# Altium PCB PCB1.PcbDoc
Units mm, origin at the board's own origin, x right, y up, seen from the top; angles counter-clockwise.
Board outline 114 x 72 mm, 2 copper layers (Top Layer, Bottom Layer); 29 components, 32 nets, 166 pads, 7 vias.
Unrouted connection lines stored in the file: 2.
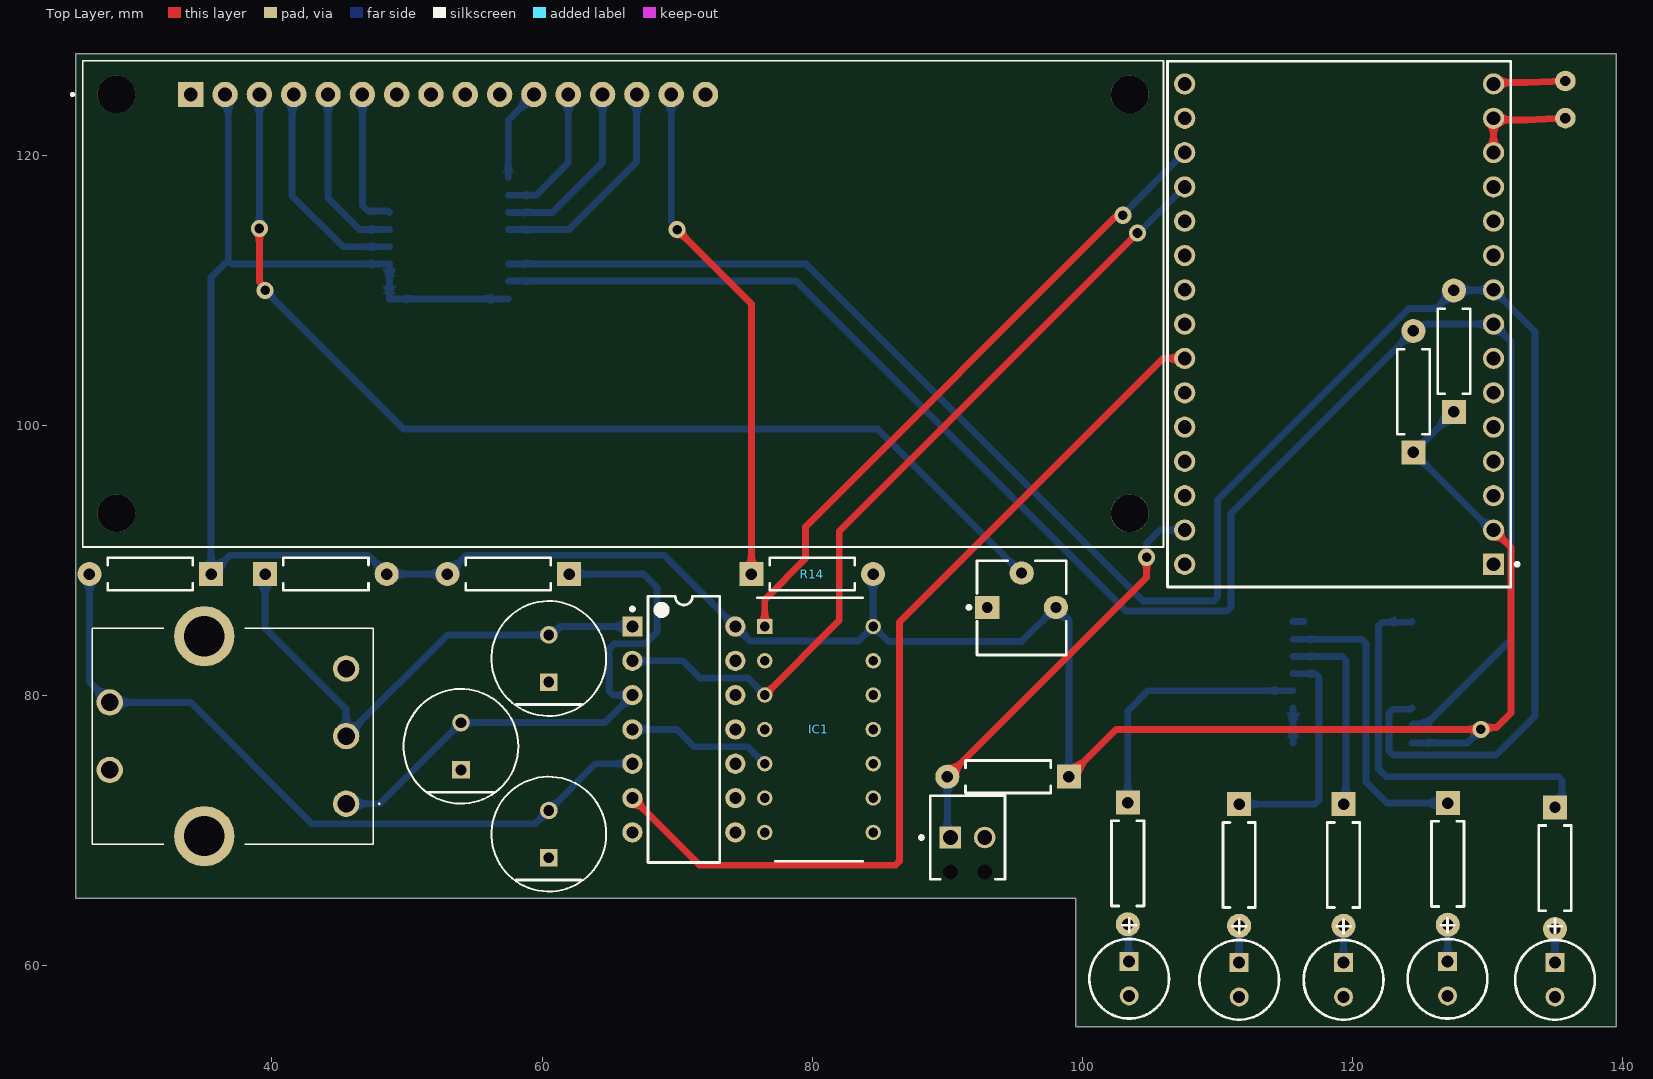
[diagram p0: Top Layer view]
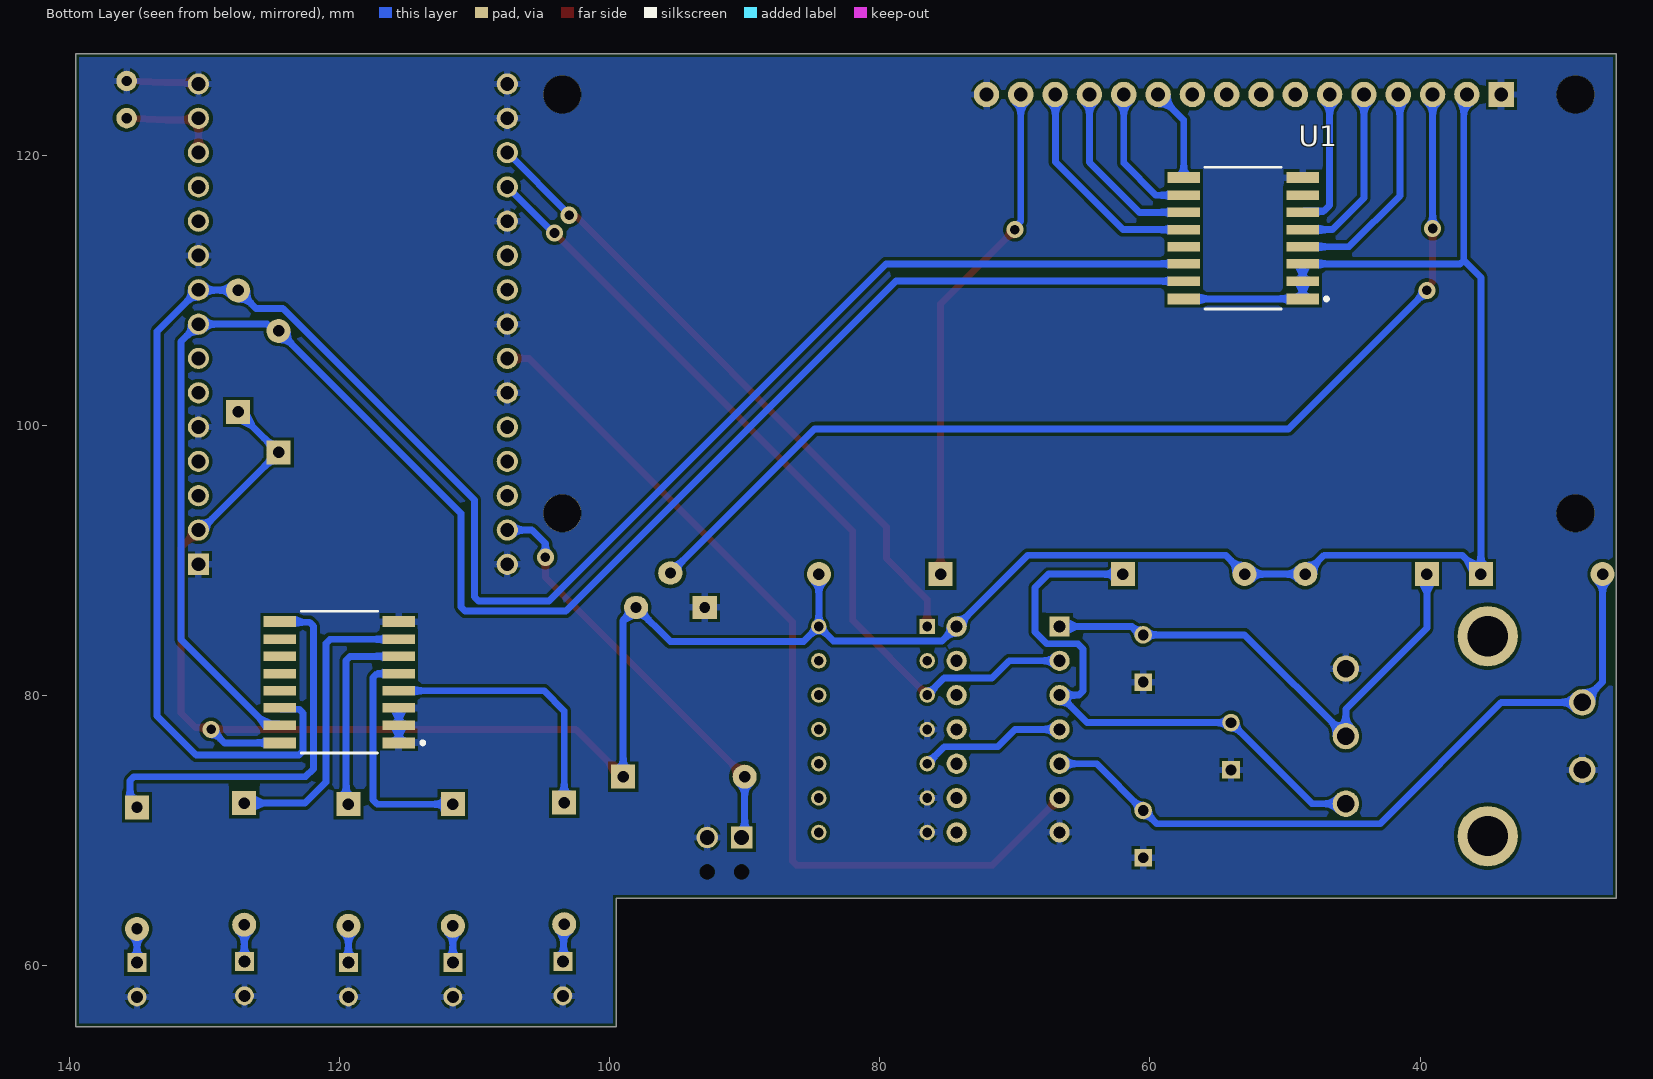
[diagram p1: Bottom Layer view, seen from below]

## Layer stack, top to bottom
Top Solder: solder mask 0.0102, Solder Resist, Dk 3.5
Top Layer: signal copper 0.0356
Dielectric 1: dielectric 0.32, FR-4, Dk 4.8
Bottom Layer: signal copper 0.0356
Bottom Solder: solder mask 0.0102, Solder Resist, Dk 3.5

## Board outline
25.5,127.5 26,127.5 139.5,127.5 139.5,55.5 99.5,55.5 99.5,65 99,65 25.5,65

## Design rules (kind name [scope] priority, off if disabled: settings)
Clearance [All] p1: gap=0.254 ignorepadtopadclearanceinfootprint=FALSE except(0: Arc-Hole Track-Hole SMDPad-Hole THPad-Hole Via-Hole Fill-Hole Poly-Hole Region-Hole Text-Hole)
ComponentClearance [All] p1 off: gap=0.254 collisioncheckmode=3 verticalgap=0.254 showdistances=FALSE
Height [All] p1 off: minheight=0 maxheight=25.4 prefheight=12.7
HoleSize [All] p1: absolutevalues=TRUE maxlimit=3 minlimit=0.7 maxpercent=80.000 minpercent=20.000
MinimumSolderMaskSliver [All] p1: minsoldermaskwidth=0.125
PlaneConnect [All] p1: planeconnectstyle=Relief reliefexpansion=0.508 reliefentries=4 reliefconductorwidth=0.305 reliefairgap=0.254
PolygonConnect [All] p1: connectstyle=Relief reliefconductorwidth=0.5 reliefentries=4 polygonreliefangle="90 Angle" airgapwidth=0.2
RoutingVias [All] p1: holewidth=0.7 width=1.7 viastyle="Through Hole" minholewidth=0.7 minwidth=1.7 maxholewidth=0.7 maxwidth=1.7
SilkToSilkClearance [All] p1: silktosilkclearance=0.12
SilkToSolderMaskClearance [IsPad] p1: minsilkscreentomaskgap=0.1 clearancetoexposedcopper=TRUE
SolderMaskExpansion [All] p1: expansion=0.102 istentingtop=FALSE
SupplyNets "Schematic Supply Nets_3" [InNet('+3.3')] p1: voltage=0.000
SupplyNets "Schematic Supply Nets_2" [InNet('GND')] p2: voltage=0.000
SupplyNets "Schematic Supply Nets" [InNet('+5')] p3: voltage=0.000
Width [All] p1: maxlimit=3.048 minlimit=0.305 preferedwidth=0.508
23 further rules are at their usual default settings.

## Classes and differential pairs
component class car_controler_sch: R14

## Components (designator, comment, footprint, x,y, rotation, side; value= is the part's Value field where it differs from the comment)
(0-20/10k "3362P-1-104LF" BOUR-3362P 95.5,86.5 r0 top
C1 "ECA-2WHG010" FP-ECA-2WHG010-MFG 60.5,82.75 r90 top
C2 "ECA-2WHG010" FP-ECA-2WHG010-MFG 54,76.25 r90 top
C3 "ECA-2WHG010" FP-ECA-2WHG010-MFG 60.5,69.75 r90 top
DS1 "RED" KING-WP7113SGD_V 103.461,59.047 r270 top
DS2 "RED" KING-WP7113SGD_V 111.602,58.966 r270 top
DS3 "RED" KING-WP7113SGD_V 119.33,58.966 r270 top
DS4 "RED" KING-WP7113SGD_V 127.027,59.047 r270 top
DS5 "RED" KING-WP7113SGD_V 134.982,58.966 r270 top
IC1 "HEF4013BP" DIP802W53P254L1902H420Q14N 80.5,77.5 r0 top
J1 "1725656" PHOE-1725656-2 91.5,69.5 r0 top
MD1 "ESP32-C3-DevKitC-02" FP-ESP32-C3-DevKitC-02-MFG 119,107.5 r180 top locked
R1 "Resistor 470r" RESA60-630X240 103.359,67.581 r270 top value=150r
R2 "Resistor 470r" RESA60-630X240 111.602,67.466 r270 top value=150r
R3 "Resistor 470r" RESA60-630X240 119.33,67.466 r270 top value=150r
R4 "Resistor 470r" RESA60-630X240 127.045,67.547 r270 top value=150r
R5 "Resistor 470r" RESA60-630X240 134.982,67.236 r270 top value=150r
R6 "4k7 resistor Axial" RESA60-630X240 94.5,74 r180 top value=10k
R9 "4k7 resistor Axial" RESA60-630X240 31,89 r180 top value=10k
R10 "4k7 resistor Axial" RESA60-630X240 44,89 r0 top value=10k
R11 "4k7 resistor Axial" RESA60-630X240 57.5,89 r180 top value=10k
R12 "4k7 resistor Axial" RESA60-630X240 124.5,102.5 r90 top value=4k7
R13 "4k7 resistor Axial" RESA60-630X240 127.5,105.5 r90 top value=4k7
R14 "4k7 resistor Axial" RESA60-630X240 80,89 r0 top value=220r
U1 "PCF8574T/3,518" FP-SOT162-1-MFG 53.1,113.865 r0 bottom
U2 "PCF8574T/3,518" FP-SOT162-1-MFG 120,81 r0 bottom
U3 "LCD-16X2" MODULE_LCD-16X2 66,109 r0 top locked
U4 "" PEC164120FS0012 45.5,72 r90 top
U5 "SN74LS14N" N0014A 70.5,77.5 r0 top

## Footprints (in the part's own frame and the unit in brackets; to place one, negate y for a bottom-side part, rotate by r counter-clockwise, add the part's x,y. Pads: shape width x height; smd on the part's side, far side on the other; paste and mask are expansions set on the pad)
BOUR-3362P [mm]
  rect 1.8x1.7 hole 0.8: 1(-2.54,0.035)
  oval 1.8x1.7 hole 0.8: 2(0,2.575) 3(2.54,0.035)
  silkscreen extent -4.02,-3.49 3.3,3.5, body extent -3.3,-3.49 3.3,3.5, height 4.5
DIP802W53P254L1902H420Q14N [mm]
  rect 1.13x1.13 hole 0.73: 1(-4.012,7.62)
  round 1.13 hole 0.73: 2(-4.012,5.08) 3(-4.012,2.54) 4(-4.012,0) 5(-4.012,-2.54) 6(-4.012,-5.08) 7(-4.012,-7.62) 8(4.012,-7.62) 9(4.012,-5.08) 10(4.012,-2.54) 11(4.012,0) 12(4.012,2.54) 13(4.012,5.08) 14(4.012,7.62)
  silkscreen extent -4.58,-9.75 3.24,9.75, body extent -4.15,-9.51 4.15,9.51, height 4.2
FP-ECA-2WHG010-MFG [mm]
  rect 1.3x1.3 hole 0.8 paste-2539.97 mask+0: 1(-1.75,0)
  round 1.3 hole 0.8 paste-2539.97 mask+0: 2(1.75,0)
  silkscreen extent -4.25,-4.25 4.25,4.25, body extent -4.35,-4.35 4.35,4.35, height 0.25
FP-ESP32-C3-DevKitC-02-MFG [mm]
  rect 1.57x1.57 hole 1.02 paste-2539.97 mask+0: 1(-11.43,17.78)
  round 1.57 hole 1.02 paste-2539.97 mask+0: 2(-11.43,15.24) 3(-11.43,12.7) 4(-11.43,10.16) 5(-11.43,7.62) 6(-11.43,5.08) 7(-11.43,2.54) 8(-11.43,0) 9(-11.43,-2.54) 10(-11.43,-5.08) 11(-11.43,-7.62) 12(-11.43,-10.16) 13(-11.43,-12.7) 14(-11.43,-15.24) 15(-11.43,-17.78) 16(11.43,-17.78) 17(11.43,-15.24) 18(11.43,-12.7) 19(11.43,-10.16) 20(11.43,-7.62) 21(11.43,-5.08) 22(11.43,-2.54) 23(11.43,0) 24(11.43,2.54) 25(11.43,5.08) 26(11.43,7.62) 27(11.43,10.16) 28(11.43,12.7) 29(11.43,15.24) 30(11.43,17.78)
  silkscreen extent -13.3,-19.46 12.7,19.46, body extent -12.8,-19.56 12.8,19.56, height 0.25
FP-SOT162-1-MFG [mm]
  rect 2.4x0.8 smd paste+0 mask+0: 1(-4.4,4.495) 8(-4.4,-4.495) 9(4.4,-4.495) 16(4.4,4.495)
  rect 2.4x0.7 smd paste+0 mask+0: 2(-4.4,3.175) 3(-4.4,1.905) 4(-4.4,0.635) 5(-4.4,-0.635) 6(-4.4,-1.905) 7(-4.4,-3.175) 10(4.4,-3.175) 11(4.4,-1.905) 12(4.4,-0.635) 13(4.4,0.635) 14(4.4,1.905) 15(4.4,3.175)
  silkscreen extent -6.29,-5.25 2.83,5.25, body extent -5.15,-5.15 5.15,5.15, height 2.65
KING-WP7113SGD_V [mm]
  rect 1.4x1.4 hole 0.889: 1(-1.27,0)
  round 1.4 hole 0.889: 2(1.27,0)
  silkscreen extent -4.47,-2.95 2.95,2.95, body extent -2.95,-2.95 2.5,2.95, height 15.5
MODULE_LCD-16X2 [mm]
  rect 1.88x1.88 / inner round 1.88 / far side rect 1.88x1.88 hole 1.016: 1(-32,15.5)
  round 1.88 hole 1.016: 2(-29.46,15.5) 3(-26.92,15.5) 4(-24.38,15.5) 5(-21.84,15.5) 6(-19.3,15.5) 7(-16.76,15.5) 8(-14.22,15.5) 9(-11.68,15.5) 10(-9.14,15.5) 11(-6.6,15.5) 12(-4.06,15.5) 13(-1.52,15.5) 14(1.02,15.5) 15(3.56,15.5) 16(6.1,15.5)
  round 2.8 hole 2.8 unplated: ""(-37.5,-15.5) ""(-37.5,15.5) ""(37.5,-15.5) ""(37.5,15.5)
  silkscreen extent -40.85,-18 40,18
N0014A [mm] "DIP, 14-Leads, Body 19.7x6.6mm, Pitch 2.54mm"
  rect 1.5x1.5 hole 0.9: 1(-3.81,7.62)
  round 1.5 hole 0.9: 2(-3.81,5.08) 3(-3.81,2.54) 4(-3.81,0) 5(-3.81,-2.54) 6(-3.81,-5.08) 7(-3.81,-7.62) 8(3.81,-7.62) 9(3.81,-5.08) 10(3.81,-2.54) 11(3.81,0) 12(3.81,2.54) 13(3.81,5.08) 14(3.81,7.62)
  silkscreen extent -3.93,-9.85 2.65,9.85, body extent -3.95,-9.85 3.95,9.85, height 5.08
PEC164120FS0012 [mm]
  round 1.95 hole 1.3: A1(0,0) B1(5,0) C1(10,0) D1(2.5,17.5) E1(7.5,17.5)
  round 4.46 hole 2.973: MH1(-2.4,10.5) MH2(12.4,10.5)
  silkscreen extent -3,-2.5 13,18.8, body extent -3.85,-1.95 13.85,18.75, height 30.47
PHOE-1725656-2 [mm] "Connector, 2-Leads, Body 6.2x5.4mm, Pitch 2.54mm"
  rect 1.6x1.6 hole 1.1: 1(-1.27,0)
  round 1.6 hole 1.1: 2(1.27,0)
  round 0 hole 1.1 unplated: MH1(-1.27,-2.54) MH2(1.27,-2.54)
  silkscreen extent -3.54,-3.1 2.77,3.1, body extent -2.77,-3.1 2.77,3.1, height 9
RESA60-630X240 [mm]
  rect 1.778x1.778 hole 0.85: 1(-4.5,0)
  round 1.778 hole 0.85: 2(4.5,0)
  silkscreen extent -3.15,-1.2 3.15,1.2, body extent -4.77,-1.19 4.77,1.2, height 2.4

## Part data
(0-20/10k: library part CMP-009-00040-2, "Square Trimpot(R) Trimming Potentiometer, 100 KOhm, 300 V, -55 to 125 degC, 3-Pin THD, RoHS, Tube", Case/Package=3326P, Manufacturer=Bourns, Max Operating Temperature=125°C, Min Operating Temperature=-55°C, Package Description="3-Pin Through Hole Device, Body 6.6 x 6.99 mm, Pitch 2.54 mm", Package Quantity=250, Power=500mW, Resistance=100k, Tolerance=10%, Voltage Rating=300V, Component Type=Resistors, Composition=Potentiometer, Datasheet URL=http://www.bourns.com/docs/Product-Datasheets/3362.pdf, Datasheet Version=May-16, Lead Pitch=2.54mm, Manufacturer Part Number=3362P-1-104LF, Manufacturer URL=http://www.bourns.com/, Mounting Technology=TH, Package Reference=3326P, Packaging=Rail/Tube, RoHS Compliant=True
C1 C2 C3: library part CMP-00287-55558411-1, "ECA-2WHG010 Aluminum Electrolytic Capacitor, 1 uF, 450 V, ± 20%, 2000 hours @ 105°C, Radial Leaded", Capacitance=1µF, Case/Package=Radial, Dielectric Material=Aluminium, Max Operating Temperature=105°C, Min Operating Temperature=-25°C, Ripple Current=18mA, Tolerance=20%, Voltage=450V, Contact Plating=Tin, Diameter=8mm, Dissipation Factor=0.24%, Height=11.5mm, Height - Seated (Max)=12.4968mm, Lead Diameter=600µm, Lead Free="Lead Free", Lead Pitch=3.5mm, Lead/Base Style=Straight, Length=11.5mm, Life (Hours)=2000hours, Mount="PCB, Through Hole", NexarPartId=55558411, Number of Pins=2, Packaging=Bulk, Radiation Hardening=No, REACH SVHC="No SVHC", RoHS=Compliant, Schedule B="8532220020, 8532220020", Termination=Radial, Voltage Rating=450V, Voltage Rating (AC)=450V, Voltage Rating (DC)=450V, Width=8mm
DS1 DS2 DS3 DS4 DS5: library part CMP-007-00010-1, "LED Green, 62.5 mW, 25 mA, -40 to 85 degC, 2-Pin THD, RoHS, Bulk", Case/Package=Radial, Colour=Green, Forward Voltage=2.2V, Manufacturer=Kingbright, Manufacturer Part Number=WP7113SGD, Package Description="2-Pin Through Hole Device, Dia 5.9 mm, Body Length 8.6 mm", Package Quantity=1000, Power=62.5mW, Component Type=LED, Datasheet URL=http://www.kingbrightusa.com/images/catalog/SPEC/WP7113SGD.pdf, Datasheet Version="Rev. 6B, 01/2015", Illumination Colour=Green, Lens Style=Dome, Luminous Intensity=40mcd, Mounting Technology=TH, Nominal Vf=2.2V, Package Reference=WP7113SGD, Packaging=Bulk, RoHS Compliant=True, Viewing Angle=30degrees
IC1: "Integrated Circuit", Manufacturer_Name=Nexperia, Mouser Part Number=N/A, Datasheet Link=https://componentsearchengine.com/Datasheets/2/HEF4013BP.pdf, Height=4.2mm, Manufacturer_Part_Number=HEF4013BP, Mouser Price/Stock=https://www.mouser.com/Search/Refine.aspx?Keyword=N%2FA
J1: library part CMP-2000-05299-1, "Male Header, Pitch 2.54 mm, 1 x 2 Position, Height 9 mm, Tail Length 3.5 mm", Colour=Green, Manufacturer="Phoenix Contact", Content=250pc(s), Datasheet URL=http://datasheet.octopart.com/1725656-Phoenix-Contact-datasheet-5302866.pdf, Datasheet Version=Apr-08, Industrial packaging=Yes, Manufacturer part No.=1725656, Manufacturer URL=http://www.phoenixcontact.com/, Number of contacts=2, Pitch=2.54mm, Type=MPT0,5/2-2,54
MD1: library part CMP-194061-000001-1, "ESP32-C3-WROOM-02 DEV BRD"
R1 R2 R3 R4 R5: library part CMP-009-00177-3, "Axial Resistor, 470 Ohm", Case/Package=Axial, Package Description="2-Pin Axial Lead, Dia 2.4 mm, Body Length 6.3 mm", Component Type=Resistors, Mounting Technology=TH
R6 R9 R10 R11 R12 R13 R14: library part CMP-009-00178-1, "Axial Resistor, 4.7 KOhm", Case/Package=Axial, Package Description="2-Pin Axial Lead, Dia 2.4 mm, Body Length 6.3 mm", Tolerance=1%, Component Type=Resistors
U1 U2: library part CMP-10112-000010-1, "IC I/O EXPANDER I2C 8B 16SOIC", Ambient Temperature Range High=+85°C, Ambient Temperature Range Low=-40°C, Frequency=100kHz, Manufacturer="NXP Semiconductors", Max Junction Temp=+125°C, Max Supply Voltage=6V, Min Supply Voltage=2.5V, Nominal Supply Current=40uA, Package=SOT162-1, Temperature="-40°C to +85°C", Automotive=No, Category=IC, ComponentLink2Description=Datasheet, ComponentLink2URL=https://www.nxp.com/docs/en/data-sheet/PCF8574_PCF8574A.pdf, Device Class L1="Integrated Circuits (ICs)", Device Class L2="Interface ICs", Device Class L3="I/O Expanders", Digikey Description="IC I/O EXPANDER I2C 8B 16SOIC", Footprint Url=https://www.nxp.com/docs/en/package-information/SOT162-1.pdf, Height=2.65mm, Interface=I2C, Ipc Land Pattern Name=SOIC127P1032X265-16, Lead Free=Yes, Manufacturer Part Number=PCF8574T/3,518, Mouser Description="PCF8574 Series 2.5 - 6V Remote 8-bit I/O Expander for I2C-bus - SOIC-16", Number Of I/Os=8, Octopart=https://octopart.com/pcf8574t%2F3%2C518-nxp+semiconductors-10470852, RoHS=TRUE, Standoff Height=0.1mm, Temperature Range High=+85°C, Temperature Range Low=-40°C
U3: "Display Development Tools 16x2 Black on Green Char LCD w Backlight", Package=None, Availability="Not in stock", Check_prices=https://www.snapeda.com/parts/LCD-16X2/Gravitech/view-part/?ref=eda, MF=Gravitech, MP=LCD-16X2, Price=None, SnapEDA_Link=https://www.snapeda.com/parts/LCD-16X2/Gravitech/view-part/?ref=snap
U4: library part PEC16-4220F-S0024, "Undefined or Miscellaneous", Manufacturer_Name=Bourns, Arrow Part Number=PEC16-4220F-S0024, Arrow Price/Stock=null?utm_currency=USD&region=nac, Datasheet Link=https://www.bourns.com/pdfs/PEC16.pdf, Height=28mm, Manufacturer_Part_Number=PEC16-4220F-S0024
U5: library part CMP-1615-00069-4, "Hex schmitt-trigger inverters, N0014A, TUBE", F @ Nom Voltage(Max)(Mhz)=35, Generic Part Number=SN74LS14, ICC @ Nom Voltage(Max)(mA)=0.06, Manufacturer="Texas Instruments", Operating Temperature Range(C)="0 to 70", Rating=Catalog, tpd @ Nom Voltage(Max)(ns)=22, Voltage(Nom)(V)=5, Bits(#)=6, Code_JEDEC=MS-001, DatasheetVersion=SDLS049B, Input Type=TTL, Output Drive (IOL/IOH)(Max)(mA)=-0.4/8, Output Type=CMOS, PackageReference=N0014A, Schmitt Trigger=Yes, Technology Family=LS, VCC(Max)(V)=5.25, VCC(Min)(V)=4.75

## Free pads (board coordinates)
  round 1.524 hole 0.762: 2(135.75,125.5) 3(135.75,122.75)

## Via types
v1: diameter 1.27, hole 0.711, Top Layer to Bottom Layer, 7 vias

## Nets (pads, with @x,y where several pads share a name; then routed paths per layer and width w, separated by ;. In a path a pad name is that pad's centre, name@x,y a point inside that pad or via, vN(x,y) a via of type N, cw(c..) or ccw(c..) an arc to the next point about the centre after c; other vN are vias at no path point)
+3.3: (0-20/10k.3 IC1.14 MD1.2 R6.1 R9.1 R10.2 R11.2 R12.1 R13.1 R14.2 U1.1 U1.2 U1.3 U1.16 U2.16 U3.2 U5.14 | length 212.1
  Top Layer w0.508: R6.1 102.5,77.5 v1(129.5,77.5) 129.646,77.646 130.646,77.646 131.723,78.723 131.723,90.967 MD1.2
  Bottom Layer w0.254: U3.2@36.5,124.46 U3.2
  Bottom Layer w0.508: U3.2 36.77,124.27 36.77,112.23 ; U1.16 U1.1 U1.2 U1.3 37.04,111.96 36.77,112.23 ; R14.2 84.506,88.994 84.506,85.126 IC1.14 ; R6.1 99,85.575 98.04,86.535 95.505,84 85.632,84 IC1.14 ; U2.16 128.505,76.505 v1(129.5,77.5) ; R13.1 R12.1 130.24,92.26 MD1.2 ; 36.77,112.23 35.5,110.96 R9.1 36.897,90.397 47.103,90.397 R10.2 R11.2 54.397,90.397 69.033,90.397 U5.14 75.383,84.047 83.439,84.047 IC1.14
+5: MD1.13 MD1.14 pad.3 | length 7.9
  Top Layer w0.508: MD1.13 MD1.14 130.55,122.62 132.88,122.62 pad.3
GND: (0-20/10k.1 C1.1 C2.1 C3.1 DS1.2 DS2.2 DS3.2 DS4.2 DS5.2 IC1.4 IC1.6 IC1.7 J1.2 MD1.1 MD1.5 MD1.10 MD1.15 MD1.16 MD1.17 MD1.20 MD1.23 MD1.25 MD1.30 pad.2 U1.8 U2.1 U2.2 U2.3 U2.8 U3.1 U3.16 U4.C1 U4.D1 U5.7 | length 8.8
  Top Layer w0.508: MD1.15 130.54,125.39 132.89,125.39 pad.2
  Bottom Layer w0.508: U2.1 U2.2 U2.3 ; U2.8 U2.8@116.4,85.495
GPIO0: J1.1 MD1.29 R6.2 | length 31.4
  Top Layer w0.508: R6.2 104.75,88.75 v1(104.75,90.25)
  Bottom Layer w0.508: R6.2 90,69.73 J1.1 ; v1@104.75,90 v1(104.75,90.25) 104.75,91.25 105.76,92.26 MD1.29
GPIO10: MD1.24 U5.6 | length 68.8
  Top Layer w0.508: U5.6 71.661,67.449 86.152,67.449 86.449,67.747 86.449,85.449 105.96,104.96 MD1.24
GPIO18: IC1.3 MD1.19 U5.2 | length 61.5
  Top Layer w0.508: IC1.3 82,85.552 82,92.17 v1(104.08,114.25)
  Bottom Layer w0.508: U5.2 70.42,82.58 71.702,81.298 75.23,81.298 IC1.3 ; v1@104,114.25 v1(104.08,114.25) 104.16,114.25 MD1.19 MD1.19@107.57,117.615
GPIO19: IC1.1 MD1.18 | length 48.3
  Top Layer w0.508: IC1.1 76.488,87.131 79.5,90.143 79.5,92.5 102.419,115.419 102.854,115.419 v1(103,115.565)
  Bottom Layer w0.508: v1@103,115.5 v1(103,115.565) 103,115.63 MD1.18 MD1.18@107.57,120.135
Net(0-20/10k_2: (0-20/10k.2 U3.3 | length 79.5
  Top Layer w0.508: v1(39.08,114.58) 39.08,110.626 39.5,110.206 v1(39.5,110)
  Bottom Layer w0.508: v1@39,114.5 v1(39.08,114.58) U3.3 ; v1(39.5,110) 49.755,99.745 84.83,99.745 95.5,89.075
NetC1_2: C1.2 R10.1 U4.B1 U5.1 | length 39
  Bottom Layer w0.508: R10.1 39.5,85 45.5,79 U4.B1 53,84.5 C1.2 60.714,84.5 61.334,85.12 U5.1
NetC2_2: C2.2 R11.1 U4.A1 U5.3 | length 43.8
  Bottom Layer w0.508: U4.A1 48,72 C2.2 64.65,78 U5.3 65.258,80.04 64.96,80.338 64.96,83.46 65.338,83.838 67.626,83.838 68.5,84.712 68.5,88 67.5,89 R11.1
NetC3_2: C3.2 R9.2 U4.E1 U5.5 | length 54.4
  Bottom Layer w0.508: R9.2 26.5,81 U4.E1 34,79.5 42.983,70.517 59.486,70.517 60.469,71.5 C3.2 63.96,74.96 U5.5
NetDS1_1: DS1.1 R1.2 | length 2.8
  Bottom Layer w0.508: R1.2 103.41,63.03 103.41,60.368 DS1.1
NetDS2_1: DS2.1 R2.2 | length 2.7
  Bottom Layer w0.508: DS2.1 R2.2
NetDS3_1: DS3.1 R3.2 | length 2.7
  Bottom Layer w0.508: DS3.1 R3.2
NetDS4_1: DS4.1 R4.2 | length 2.7
  Bottom Layer w0.508: DS4.1 127.036,60.326 127.036,63.038 R4.2
NetDS5_1: DS5.1 R5.2 | length 2.5
  Bottom Layer w0.508: DS5.1 R5.2
NetIC1_5: IC1.5 U5.4 | length 10.9
  Bottom Layer w0.508: U5.4 70,77.5 71.282,76.218 75.23,76.218 IC1.5
NetR1_1: R1.1 U2.4 | length 19.6
  Bottom Layer w0.508: R1.1 103.359,78.859 104.865,80.365 U2.4
NetR2_1: R2.1 U2.5 | length 17.1
  Bottom Layer w0.508: R2.1 117.202,71.966 117.5,72.264 117.5,81.328 117.202,81.626 115.609,81.626 U2.5
NetR3_1: R3.1 U2.6 | length 14.8
  Bottom Layer w0.508: U2.6 119.202,82.905 119.5,82.607 119.5,72.296 R3.1@119.83,71.966
NetR4_1: R4.1 U2.7 | length 23
  Bottom Layer w0.508: U2.7 120.702,84.175 121,83.877 121,73.594 122.547,72.047 R4.1@127.545,72.047
NetR5_1: R5.1 U2.9 | length 29.1
  Bottom Layer w0.508: U2.9 124.341,85.436 122.228,85.436 121.93,85.138 121.93,74.57 122.5,74 135.202,74 135.5,73.702 135.5,71.754 R5.1@135.482,71.736
NetR14_1: R14.1 U3.15 | length 38
  Top Layer w0.508: v1(70,114.5) 75.5,109 R14.1
  Bottom Layer w0.508: U3.15 69.56,115.146 70,114.706 v1(70,114.5)
P0_RS: U1.4 U3.4 | length 16.3
  Bottom Layer w0.508: U3.4 41.5,124.38 41.5,117 45.27,113.23 U1.4
P1_RW: U1.5 U3.5 | length 13.2
  Bottom Layer w0.508: U3.5 44.16,116.84 46.5,114.5 U1.5
P2_E: U1.6 U3.6 | length 10.7
  Bottom Layer w0.254: U3.6@46.5,124.3 U3.6
  Bottom Layer w0.508: U3.6 46.7,116.3 47.134,115.866 48.604,115.866 U1.6
P4_DB4: U1.9 U3.11 | length 6.9
  Bottom Layer w0.508: U1.9 57.5,122.6 U3.11
P5_DB5: U1.10 U3.12 | length 10.5
  Bottom Layer w0.508: U1.10 59.54,117.04 61.94,119.44 U3.12
P6_DB6: U1.11 U3.13 | length 13.5
  Bottom Layer w0.508: U1.11 60.77,115.77 64.48,119.48 U3.13
P7_DB7: U1.12 U3.14 | length 16.6
  Bottom Layer w0.508: U1.12 62,114.5 67,119.5 67,124.48 U3.14
SCL: MD1.9 R13.2 U1.14 U2.14 | length 146.6
  Bottom Layer w0.508: U1.14 79.54,111.96 104.481,87.019 109.702,87.019 110,87.317 110,94.476 124.192,108.668 126.168,108.668 R13.2 127.52,110.02 130.41,110.02 MD1.9 133.5,106.97 133.5,78.5 130.597,75.597 122.99,75.597 122.692,75.895 122.692,78.701 122.99,78.999 124.304,78.999 U2.14
SDA: MD1.8 R12.2 U1.15 U2.15 | length 129.7
  Bottom Layer w0.508: U1.15 78.81,110.69 103.243,86.257 110.702,86.257 111,86.555 111,93.5 R12.2 124.844,107 125.344,107.5 MD1.8 131.723,106.207 131.723,84.15 125.494,77.921 124.496,77.921 U2.15
pads on no net: IC1.2 IC1.8 IC1.9 IC1.10 IC1.11 IC1.12 IC1.13 J1.MH1 J1.MH2 MD1.3 MD1.4 MD1.6 MD1.7 MD1.11 MD1.12 MD1.21 MD1.22 MD1.26 MD1.27 MD1.28 U1.7 U1.13 U2.10 U2.11 U2.12 U2.13 U3. U3.7 U3.8 U3.9 U3.10 U4.MH1 U4.MH2 U5.8 U5.9 U5.10 U5.11 U5.12 U5.13

## Polygon pours and split planes (outlines as drawn)
GND on Bottom Layer "GND_PLANE" (solid, pour order 0): 25.75,127.25 25.75,65.25 99.75,65.25 99.75,55.75 139.25,55.75 139.25,127.25